# Altium PCB ArcNano_PCB.PcbDoc
Units mm, origin at the board's own origin, x right, y up, seen from the top; angles counter-clockwise.
Board outline 17.78 x 43.18 mm, 2 copper layers (Top Layer, Bottom Layer), stack 1.67 mm thick; 41 components, 45 nets, 192 pads, 75 vias.
Unrouted connection lines stored in the file: 3.
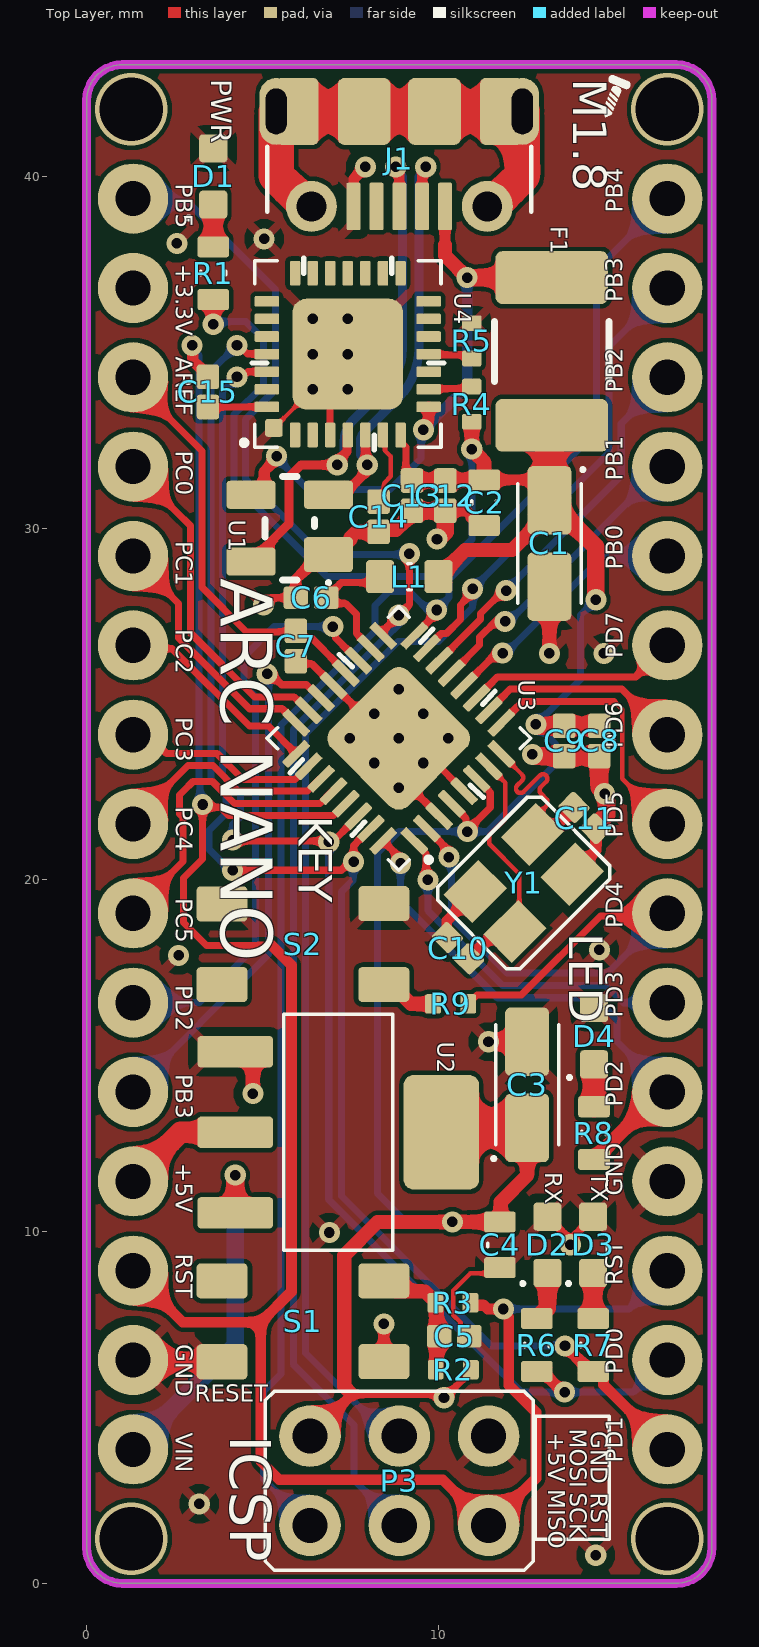
[diagram p0: Top Layer view]
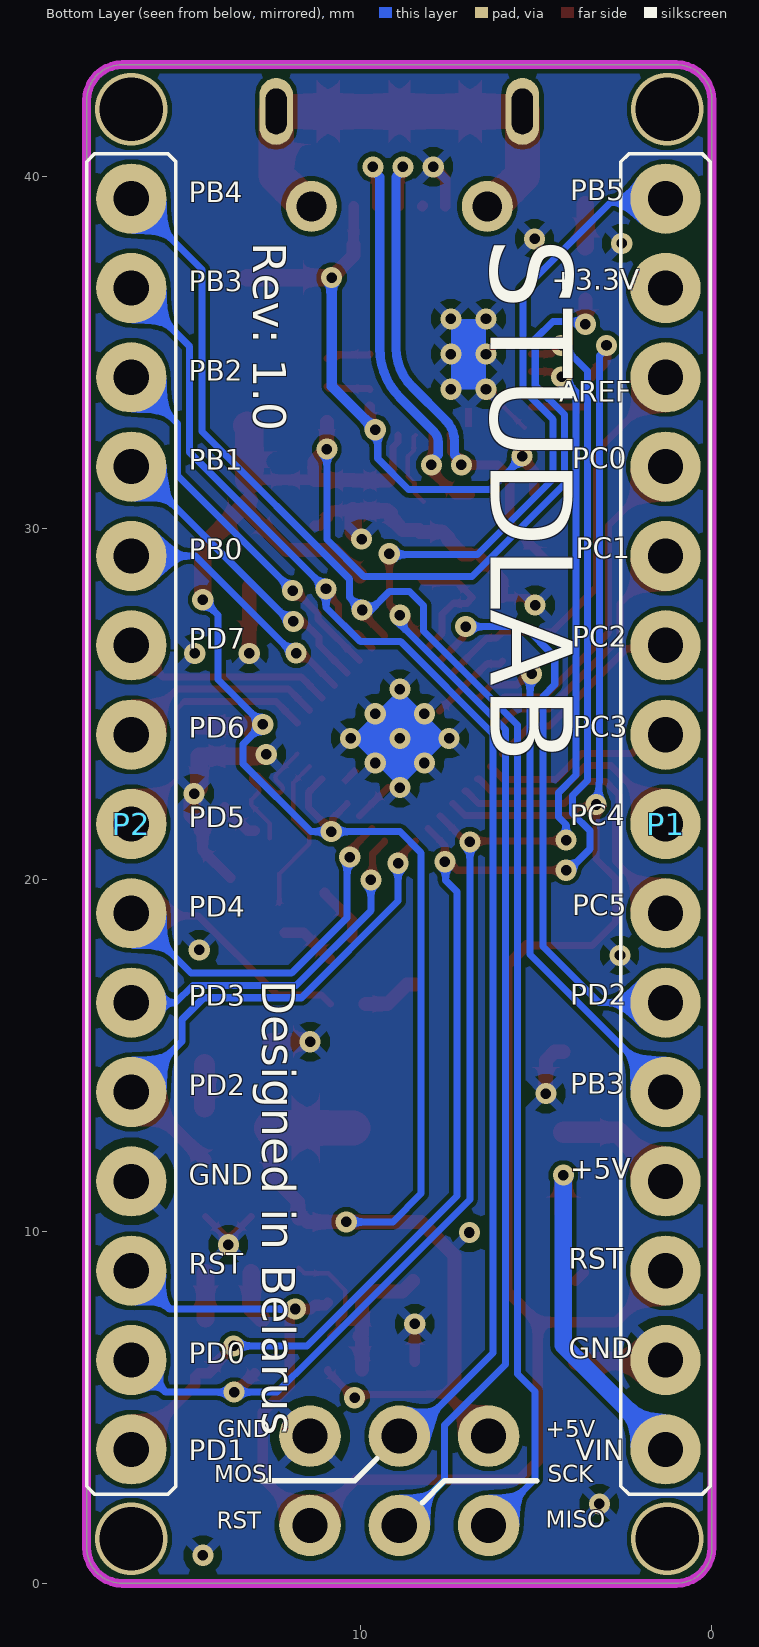
[diagram p1: Bottom Layer view, seen from below]
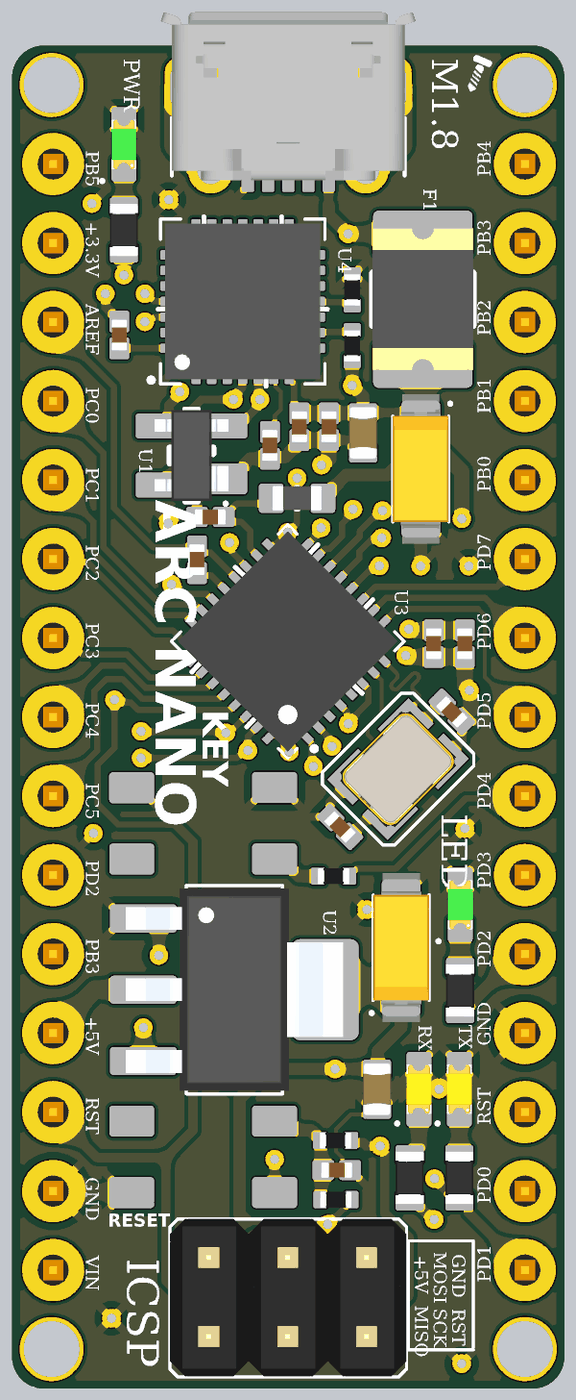
[diagram p2: 3D render of the assembled board from above, using the file's embedded part models]

## Layer stack, top to bottom
Top Solder: solder mask 0.0102, Solder Resist, Dk 3.5
Top Layer: signal copper 0.035
Core: dielectric 1.6, FR-4, Dk 4.6
Bottom Layer: signal copper 0.035
Bottom Solder: solder mask 0.0102, Solder Resist, Dk 3.5

## Board outline
0,1.016 0,42.164 cw(c1.016,42.164) 1.016,43.18 16.764,43.18 cw(c16.764,42.164) 17.78,42.164 17.78,1.016 cw(c16.764,1.016) 16.764,0 1.016,0 cw(c1.016,1.016)

## Design rules (kind name [scope] priority, off if disabled: settings)
BoardOutlineClearance [All] p1: gap=0.2 ignorepadtopadclearanceinfootprint=FALSE except(0: Arc-SplitContinuation Track-SplitContinuation SMDPad-SplitContinuation THPad-SplitContinuation Via-SplitContinuation Fill-SplitContinuation Poly-SplitContinuation Region-SplitContinuation Text-SplitContinuation)
Clearance Clearance_DifferentNets [All] p1: gap=0.127 ignorepadtopadclearanceinfootprint=TRUE except(0.15: Text-Text; 0.2: Arc-SMDPad Arc-THPad Track-SMDPad Track-THPad; 0.254: Arc-Via Track-Via Via-Via; 0.5: THPad-Via)
Clearance Clearance_SameNets [All] p2: gap=0.127 ignorepadtopadclearanceinfootprint=TRUE except(0: SMDPad-Fill SMDPad-Poly SMDPad-Region Region-Region; 0.15: Text-Text; 0.2: Arc-SMDPad Arc-THPad Track-SMDPad Track-THPad; 0.254: Arc-Via Track-Via Via-Via)
DiffPairsRouting [All] p1: maxlimit=0.254 minlimit=0.203 mostfreqgap=0.203 toplayer_minwidth=0.261 toplayer_maxwidth=0.381 toplayer_prefwidth=0.261 bottomlayer_minwidth=0.261 bottomlayer_maxwidth=0.381 bottomlayer_prefwidth=0.261 maxuncoupledlength=12.7
HoleSize [All] p1: absolutevalues=TRUE maxlimit=6.3 minlimit=0.2 maxpercent=80.000 minpercent=20.000
HoleToHoleClearance [All] p1: gap=0.5 allowstackedmicrovias=TRUE
MatchedLengths USB [InDifferentialPair('USB')] p1: tolerance=0.1 checknetsindiffpair=TRUE checkdiffpairvsdiffpair=FALSE checkxsignals=FALSE checkothers=FALSE
MinimumAnnularRing [All] p1: minimumring=0.13
MinimumSolderMaskSliver [All] p1: minsoldermaskwidth=0.05
PolygonConnect [All] p1: connectstyle=Relief reliefconductorwidth=0.254 reliefentries=4 polygonreliefangle="45 Angle" airgapwidth=0.254
RoutingVias [All] p1: holewidth=0.3 width=0.6 viastyle="Through Hole" minholewidth=0.2 minwidth=0.4 maxholewidth=6.3 maxwidth=6.35
ShortCircuit [All] p1: allowed=TRUE
SilkToSilkClearance [All] p1: silktosilkclearance=0.15
SolderMaskExpansion [All] p1: expansion=0.05 istentingtop=FALSE useseparateexpansions=TRUE expansionbottom=0.05 istentingbottom=FALSE
UnRoutedNet [All] p1: checkbadconnections=TRUE
Width [All] p1: maxlimit=1 minlimit=0.09 preferedwidth=0.2 minimp=50.000000 maximp=50.000000 favimp=50.000000
23 further rules are at their usual default settings.

## Classes and differential pairs
component class ArcNano_Schematic_POWER: C1 C2 C3 C4 D1 F1 J1 R1 U1 U2
component class ArcNano_Schematic_MCU: C5 C6 C7 C8 C9 C10 C11 C12 C13 C14 C15 D2 D3 D4 L1 P1 P2 P3 R2 R3 R4 R5 R6 R7 R8 R9 S1 S2 U3 U4 Y1
differential pair USB: +USB_P -USB_N

## Components (designator, comment, footprint, x,y, rotation, side; value= is the part's Value field where it differs from the comment)
C1 "" "TANT A" 13.157,29.566 r270 top value=10uF
C2 "" C0603 11.3,30.725 r90 top value=0.1uF
C3 "" "TANT A" 12.525,14.175 r90 top value=10uF
C4 "" C0603 11.75,9.625 r90 top value=0.1uF
C5 "" C0402 10.45,7.025 r180 top value=0.1uF
C6 "" C0402 6.38,28.025 r0 top value=0.1uF
C7 "" C0402 5.95,26.65 r90 top value=0.1uF
C8 "" C0402 14.575,23.95 r90 top value=0.1uF
C9 "" C0402 13.575,23.95 r90 top value=0.1uF
C10 "" C0402 10.56,18.059 r315 top value=10pF
C11 "" C0402 14.16,21.759 r135 top value=10pF
C12 "" C0402 10.2,30.925 r90 top value=1uF
C13 "" C0402 9.25,30.925 r90 top value=0.1uF
C14 "" C0402 8.3,30.325 r90 top value=0.1uF
C15 "" C0402 3.45,33.875 r270 top value=0.1uF
D1 "PWR" D0603_LED_RED 3.6,40 r90 top value=RED
D2 "RX" D0603_LED_YELLOW 13.1,9.625 r90 top value=YELLOW
D3 "TX" D0603_LED_YELLOW 14.4,9.625 r90 top value=YELLOW
D4 "LED" D0603_LED_GREEN 14.427,15.557 r90 top value=GREEN
F1 "" MF-MSMF050 13.225,35.025 r270 top value=0.5A
J1 "USB Type-B Micro" "USB MOLEX 1050170001" 8.89,41.5 r180 top
L1 "" IND0603 9.175,28.625 r180 top value=10uH
P1 "Header 15" "CONN-15 1x15 MALE" 1.32,21.59 r270 bottom value=1x15
P2 "Header 15" "CONN-15 1x15 MALE" 16.51,21.59 r90 bottom value=1x15
P3 "Connector 2x3 0.1\"" "CONN-6 2x3 MALE" 8.89,2.916 r90 top value=2x3
R1 "" R0603 3.6,37.25 r90 top value=1k
R2 "" R0402 10.425,6.075 r0 top value=10k
R3 "" R0402 10.414,7.976 r180 top value=1k
R4 "" R0402 10.95,33.525 r270 top value=4.7k
R5 "" R0402 10.95,35.325 r270 top value=10k
R6 "" R0603 12.8,6.775 r90 top value=1k
R7 "" R0603 14.4,6.775 r90 top value=1k
R8 "" R0603 14.425,12.8 r90 top value=1k
R9 "" R0402 10.35,16.475 r180 top value=1k
S1 "RESET" PTS815SJG250SMTRLFS 6.15,7.45 r180 top
S2 "KEY" PTS815SJG250SMTRLFS 6.15,18.175 r0 top
U1 "SP0503BAHTG" SOT143-4 5.775,30 r180 top
U2 "AMS1117-5.0" SOT-223 7.155,12.825 r0 top
U3 "ATmega328P" "QFN-32 (5x5)  Thermal Pad" 8.875,24.025 r135 top
U4 "" "QFN-28 (5x5) Thermal Pad" 7.425,34.95 r90 top
Y1 "16.000MHz" TSX-3225 12.41,19.934 r45 top

## Footprints (in the part's own frame and the unit in brackets; to place one, negate y for a bottom-side part, rotate by r counter-clockwise, add the part's x,y. Pads: shape width x height; smd on the part's side, far side on the other; paste and mask are expansions set on the pad)
C0402 [mm] "Chip Capacitor, 2-Leads, Body 1,00x0,50mm, IPC Medium Density"
  rrect25% 0.7x0.64 smd: 1(-0.43,0) 2(0.43,0)
  body extent -0.5,-0.25 0.5,0.25, height 0.55
C0603 [mm] "Chip Capacitor, 2-Leads, Body 1,60x0,80mm, IPC Medium Density"
  rrect25% 0.6x0.9 smd: 1(-0.65,0) 2(0.65,0)
  silkscreen extent -0.05,-0.35 0.05,0.35, body extent -0.85,-0.45 0.85,0.45, height 0.9
"CONN-6 2x3 MALE" [mm]
  round 1.75 hole 1: 1(-1.27,2.54) 2(1.27,2.54) 3(-1.27,0) 4(1.27,0) 5(-1.27,-2.54) 6(1.27,-2.54)
  silkscreen extent -2.54,-3.81 2.54,3.81, body extent -2.53,-3.81 2.55,3.81, height 9.2
"CONN-15 1x15 MALE" [mm]
  round 2 hole 1: 1(-17.78,0) 2(-15.24,0) 3(-12.7,0) 4(-10.16,0) 5(-7.62,0) 6(-5.08,0) 7(-2.54,0) 8(0,0) 9(2.54,0) 10(5.08,0) 11(7.62,0) 12(10.16,0) 13(12.7,0) 14(15.24,0) 15(17.78,0)
  silkscreen extent -19.05,-1.27 19.05,1.27, body extent -19.05,-1.27 19.05,1.27, height 8.89
D0603_LED_GREEN [mm] "Molded Diode, 2-Leads, Body 1,60x0,80mm, IPC Medium Density"
  rrect25% 0.8x0.8 smd: 1(-0.8,0) 2(0.8,0)
  silkscreen extent -1.22,0.65 -1.13,0.75, body extent -0.8,-0.4 0.8,0.4, height 0.4
D0603_LED_RED [mm] "Molded Diode, 2-Leads, Body 1,60x0,80mm, IPC Medium Density"
  rrect25% 0.8x0.8 smd: 1(-0.8,0) 2(0.8,0)
  silkscreen extent -1.22,0.65 -1.13,0.75, body extent -0.8,-0.4 0.8,0.4, height 0.4
D0603_LED_YELLOW [mm] "Molded Diode, 2-Leads, Body 1,60x0,80mm, IPC Medium Density"
  rrect25% 0.8x0.8 smd: 1(-0.8,0) 2(0.8,0)
  silkscreen extent -1.15,0.65 -1.05,0.75, body extent -0.8,-0.4 0.8,0.4, height 0.4
IND0603 [mm] "Chip Inductor, 2-Leads, Body 1,60x0,80mm, IPC Medium Density"
  rrect25% 0.8x0.94 smd: 1(-0.83,0) 2(0.83,0)
  silkscreen extent -0.05,-0.37 0.05,0.37, body extent -0.8,-0.4 0.8,0.4, height 0.95
MF-MSMF050 [mm] "Fuse 0.5A"
  rrect25% 1.5x3.2 smd: 1(-2.1,0) 2(2.1,0)
  silkscreen extent -0.85,-1.63 0.85,1.63, body extent -2.27,-1.62 2.28,1.62, height 0.85
PTS815SJG250SMTRLFS [mm] "3.2x4.2 Tact Switch"
  rrect25% 1.45x1 smd: 1(-2.302,1.144) 1(2.3,1.15) 2(-2.3,-1.15) 2(2.3,-1.15)
  body extent -2.25,-1.6 2.25,1.6, height 2.5
"QFN-28 (5x5) Thermal Pad" [mm] "QFN, 28-Leads, Body 5,00x5,00mm, Pitch 0,50mm, Thermal Pad 3,15x3,15mm, IPC Medium Density"
  rrect25% 0.7x0.3 smd: 1(-2.3,1.5) 2(-2.3,1) 3(-2.3,0.5) 4(-2.3,0) 5(-2.3,-0.5) 6(-2.3,-1) 7(-2.3,-1.5) "15 : NC"(2.3,-1.5) "16 : NC"(2.3,-1) "17 : NC"(2.3,-0.5) "18 : NC"(2.3,0) "19 : NC"(2.3,0.5) "20 : NC"(2.3,1) "21 : NC"(2.3,1.5)
  rrect25% 0.5x0.5 smd: 3(-2.1,2.1)
  rrect25% 3.15x3.15 smd: 3(0,0)
  rrect25% 0.3x0.7 smd: 8(-1.5,-2.3) 9(-1,-2.3) "10 : NC"(-0.5,-2.3) 11(0,-2.3) 12(0.5,-2.3) "13 : NC"(1,-2.3) "14 : NC"(1.5,-2.3) "22 : NC"(1.5,2.3) 23(1,2.3) 24(0.5,2.3) 25(0,2.3) 26(-0.5,2.3) 27(-1,2.3) 28(-1.5,2.3)
  Top Layer region: -2.075,0.4 -1.525,0.4 -1.525,0.6 -2.075,0.6
  silkscreen extent -2.65,-2.65 2.65,2.97, body extent -2.5,-2.5 2.5,2.5, height 1
"QFN-32 (5x5)  Thermal Pad" [mm] "QFN, 32-Leads, Body 5,00x5,00mm, Pitch 0,50mm, Thermal Pad 3,10x3,10mm, IPC Medium Density"
  rrect25% 0.9x0.25 smd: 1(-2.375,1.75) 2(-2.375,1.25) 3(-2.375,0.75) 4(-2.375,0.25) 5(-2.375,-0.25) 6(-2.375,-0.75) 7(-2.375,-1.25) 8(-2.375,-1.75) 17(2.375,-1.75) 18(2.375,-1.25) 19(2.375,-0.75) 20(2.375,-0.25) 21(2.375,0.25) 22(2.375,0.75) 23(2.375,1.25) 24(2.375,1.75)
  rrect25% 3.1x3.1 smd: 5(0,0)
  rrect25% 0.25x0.9 smd: 9(-1.75,-2.375) 10(-1.25,-2.375) 11(-0.75,-2.375) 12(-0.25,-2.375) 13(0.25,-2.375) 14(0.75,-2.375) 15(1.25,-2.375) 16(1.75,-2.375) 25(1.75,2.375) 26(1.25,2.375) 27(0.75,2.375) 28(0.25,2.375) 29(-0.25,2.375) 30(-0.75,2.375) 31(-1.25,2.375) 32(-1.75,2.375)
  Top Layer region: -2.025,-0.35 -1.475,-0.35 -1.475,-0.15 -2.025,-0.15
  silkscreen extent -3.07,-2.65 2.65,2.65, body extent -2.5,-2.5 2.5,2.5, height 0.9
R0402 [mm] "Chip Resistor, 2-Leads, Body 1,00x0,50mm, IPC Medium Density"
  rrect25% 0.45x0.55 smd: 1(-0.5,0) 2(0.5,0)
  body extent -0.51,-0.25 0.51,0.25, height 0.36
R0603 [mm] "Chip Resistor, 2-Leads, Body 1,60x0,85mm, IPC Medium Density"
  rrect25% 0.6x0.9 smd: 1(-0.75,0) 2(0.75,0)
  silkscreen extent -0.05,-0.35 0.05,0.35, body extent -0.85,-0.45 0.85,0.45, height 0.55
SOT143-4 [mm] "SOT143, 4-Leads, Body 2,92x2,51mm, Pitch 1,90mm, IPC Medium Density"
  rrect25% 1.4x1 smd: 1(-1.1,0.75)
  rrect25% 1.4x0.8 smd: 2(-1.1,-0.95) 3(1.1,-0.95) 4(1.1,0.95)
  silkscreen extent -1.15,-1.48 0.7,1.6, body extent -1.18,-1.46 1.19,1.46, height 1.22
SOT-223 [mm] "SOT223, 4-Leads, Body 6,51x7,00mm (avg), Pitch 2,29mm, IPC Medium Density"
  rrect25% 2.15x0.9 smd: 1(-2.93,2.29) 2(-2.93,0) 3(-2.93,-2.29)
  rrect25% 2.15x3.25 smd: 2(2.93,0)
  silkscreen extent -1.55,-3.35 1.55,3.35, body extent -3.5,-3.25 3.5,3.25, height 1.8
"TANT A" [mm] "Molded Capacitor, 2-Leads, Body 3,20x1,60mm, IPC Medium Density"
  rrect25% 1.95x1.25 smd: 1(-1.225,0) 2(1.225,0)
  silkscreen extent -2.15,-0.9 1.7,1, body extent -2.4,-0.9 2.4,0.9, height 1.8
TSX-3225 [mm] "Crystal"
  rect 1.4x1.15 smd: 1(-1.15,-0.825) 2(1.15,-0.825) 3(1.15,0.775) 4(-1.15,0.775)
  silkscreen extent -2.07,-1.68 2.08,1.63, body extent -1.6,-1.28 1.6,1.23, height 0.6
"USB MOLEX 1050170001" [mm]
  rrect25% 0.4x1.35 smd: 1(-1.3,2.35) 2(-0.65,2.35) 3(0,2.35) 4(0.65,2.35) 5(1.3,2.35)
  round 1.45 hole 0.85: SH1(-2.5,2.35) SH2(2.5,2.35)
  oval 0.95x1.9 hole 0.6 slot 1.3 at 90 deg: SH3(-3.5,-0.35) SH8(3.5,-0.35)
  rrect25% 1.2x1.9 smd: SH4(-2.9,-0.35) SH7(2.9,-0.35)
  rrect25% 1.5x1.9 smd: SH5(-1,-0.35) SH6(1,-0.35)
  silkscreen extent -3.75,0.65 3.75,2.5, body extent -4.1,-2.75 4.1,2.65, height 2.66

## Part data
C1 C3: library part Capacitor_POL, Case="TANT A", JLCPCB Part #=C7171, Manufacturer=AVX, MFR.Part #=TAJA106K016RNJ, HelpURL=https://lcsc.com/product-detail/Tantalum-Capacitors_AVX-TAJA106K016RNJ_C7171.html, Model=TAJA106K016RNJ
C2 C4: library part Capacitor, Case=C0603, JLCPCB Part #=C77055, Manufacturer="Murata Electronics", MFR.Part #=GRM188R71H104KA93D, HelpURL=https://lcsc.com/product-detail/Multilayer-Ceramic-Capacitors-MLCC-SMD-SMT_Murata-Electronics-GRM188R71H104KA93D_C77055.html, Model=GRM188R71H104KA93D
C5 C6 C7 C8 C9 C13 C14 C15: library part Capacitor, Case=C0402, JLCPCB Part #=C77020, Manufacturer="Murata Electronics", MFR.Part #=GRM155R71H104KE14D, HelpURL=https://lcsc.com/product-detail/Multilayer-Ceramic-Capacitors-MLCC-SMD-SMT_Murata-Electronics-GRM155R71H104KE14D_C77020.html, Model=GRM155R71H104KE14D
C10 C11: library part Capacitor, Case=C0402, JLCPCB Part #=C32949, Manufacturer="Samsung Electro-Mechanics", MFR.Part #=CL05C100JB5NNNC, HelpURL=https://lcsc.com/product-detail/Multilayer-Ceramic-Capacitors-MLCC-SMD-SMT_Samsung-Electro-Mechanics-CL05C100JB5NNNC_C32949.html, Model=CL05C100JB5NNNC
C12: library part Capacitor, Case=C0402, JLCPCB Part #=C126521, Manufacturer="Murata Electronics", MFR.Part #=GCM155C71A105KE38D, HelpURL=https://lcsc.com/product-detail/Multilayer-Ceramic-Capacitors-MLCC-SMD-SMT_Murata-Electronics-GCM155C71A105KE38D_C126521.html, Model=GCM155C71A105KE38D
D1: library part LED, Case=0603, JLCPCB Part #=C72044, Manufacturer="Everlight Elec", MFR.Part #=19-217/R6C-AL1M2VY/3T, HelpURL=https://lcsc.com/product-detail/Light-Emitting-Diodes-LED_Everlight-Elec-19-217-R6C-AL1M2VY-3T_C72044.html, Model=19-217/R6C-AL1M2VY/3T
D2 D3: library part LED, "LED Indication - Discrete 1.95V", Case=0603, JLCPCB Part #=C72038, Manufacturer="Everlight Elec", MFR.Part #=19-213/Y2C-CQ2R2L/3T(CY), HelpURL=https://lcsc.com/product-detail/Light-Emitting-Diodes-LED_Everlight-Elec-19-213-Y2C-CQ2R2L-3T-CY_C72038.html, Model=19-213/Y2C-CQ2R2L/3T(CY)
D4: Case=0603, JLCPCB Part #=C72043, Manufacturer="Everlight Elec", MFR.Part #=19-217/GHC-YR1S2/3T, HelpURL=https://lcsc.com/product-detail/Light-Emitting-Diodes-LED_Everlight-Elec-19-217-GHC-YR1S2-3T_C72043.html, Model=19-217/GHC-YR1S2/3T
F1: library part Fuse, Case=1812, JLCPCB Part #=C17313, Manufacturer=Bourns, MFR.Part #=MF-MSMF050-2, HelpURL=https://lcsc.com/product-detail/Resettable-Fuses_BOURNS-MF-MSMF050-2_C17313.html, Model=MF-MSMF050
J1: "USB - micro B USB 2.0 Receptacle Connector 5 Position Surface Mount, Right Angle; Through Hole", JLCPCB Part #=C136000, Manufacturer=Molex, MFR.Part #=1050170001, Case="USB Type-B Micro", HelpURL=https://lcsc.com/product-detail/USB-Connectors_MOLEX-1050170001_C136000.html, Model="USB Type-B Micro"
L1: library part Inductor, Case=IND0603, JLCPCB Part #=C1035, Manufacturer=Sunlord, MFR.Part #=SDFL1608S100KTF, HelpURL=https://lcsc.com/product-detail/Inductors-SMD_Sunlord-SDFL1608S100KTF_C1035.html, Model=SDFL1608S100KTF
P1 P2: library part "Connector 1x15 0.1\"", Case=1x15, JLCPCB Part #=C124373, Manufacturer="Ckmtw(Shenzhen Cankemeng)", MFR.Part #=B-2100S15P-A110, HelpURL=https://lcsc.com/product-detail/Pin-Headers_Ckmtw-Shenzhen-Cankemeng-B-2100S15P-A110_C124373.html
P3: Case=2x3, JLCPCB Part #=C412086, Manufacturer="Amphenol ICC", MFR.Part #=67996-106HLF, HelpURL=https://lcsc.com/product-detail/Pin-Headers_Amphenol-ICC-67996-106HLF_C412086.html
R1 R6 R7 R8: library part Resistor, Case=R0603, JLCPCB Part #=C14676, Manufacturer=YAGEO, MFR.Part #=RC0603JR-071KL, HelpURL=https://lcsc.com/product-detail/Chip-Resistor-Surface-Mount_YAGEO-RC0603JR-071KL_C14676.html, Model=RC0603JR-071KL
R2 R5: library part Resistor, Case=R0402, JLCPCB Part #=C60489, Manufacturer=YAGEO, MFR.Part #=RC0402JR-0710KL, HelpURL=https://lcsc.com/product-detail/Chip-Resistor-Surface-Mount_YAGEO-RC0402JR-0710KL_C60489.html, Model=RC0402JR-0710KL
R3 R9: library part Resistor, Case=R0402, JLCPCB Part #=C105637, Manufacturer=YAGEO, MFR.Part #=RC0402JR-071KL, HelpURL=https://lcsc.com/product-detail/Chip-Resistor-Surface-Mount_YAGEO-RC0402JR-071KL_C105637.html, Model=RC0402JR-071KL
R4: library part Resistor, Case=R0402, JLCPCB Part #=C105870, Manufacturer=YAGEO, MFR.Part #=RC0402JR-074K7L, HelpURL=https://lcsc.com/product-detail/Chip-Resistor-Surface-Mount_YAGEO-RC0402JR-074K7L_C105870.html, Model=RC0402JR-074K7L
S1 S2: library part Button, Case=3.2x2.5mm, JLCPCB Part #=C411883, Manufacturer=C&K, MFR.Part #=PTS815SJG250SMTRLFS, HelpURL=https://lcsc.com/product-detail/Tactile-Switches_C-K-PTS815SJG250SMTRLFS_C411883.html, Model=PTS815SJG250
U1: "TVS DIODE 5.5V 8.5V", Case=SOT-143, JLCPCB Part #=C7074, Manufacturer="Littelfuse Inc.", HelpURL=https://lcsc.com/product-detail/TVS_Littelfuse-SP0503BAHTG_C7074.html, MFR.Part #=SP0503BAHTG, Model=SP0503BAHTG
U2: Case=SOT-223, JLCPCB Part #=C6187, Manufacturer="Advanced Monolithic Systems", HelpURL=https://lcsc.com/product-detail/Linear-Voltage-Regulators-LDO_Advanced-Monolithic-Systems-AMS1117-5-0_C6187.html, MFR.Part #=AMS1117-5.0, Model=AMS1117-5.0
U3: "AVR series Microcontroller IC 8-Bit", Case="QFN-32 (5x5)", JLCPCB Part #=C38896, Manufacturer="Microchip Technology", MFR.Part #=ATMEGA328P-MU, HelpURL=https://lcsc.com/product-detail/ATMEL-AVR_Microchip-Tech-ATMEGA328P-MU_C38896.html, Model=ATMEGA328P-MU
U4: library part CP2102, "USB Bridge, USB to UART USB 2.0 UART Interface", Case="QFN-28 (5x5)", JLCPCB Part #=C6568, Manufacturer="Silicon Laboratories", MFR.Part #=CP2102-GMR, HelpURL=https://lcsc.com/product-detail/USB-ICs_SILICON-LABS-CP2102-GMR_C6568.html, Model=CP2102-GMR
Y1: library part Crystal_TSX-3225, "CRYSTAL 24.0000MHZ 9PF SMD", Case=TSX-3225, JLCPCB Part #=C13738, Manufacturer="Yangxing Tech", MFR.Part #=X322516MLB4SI, HelpURL=https://lcsc.com/product-detail/Crystals_Yangxing-Tech-X322516MLB4SI_C13738.html, Model=X322516MLB4SI

## Via types
v1: diameter 0.6, hole 0.3, Top Layer to Bottom Layer, 71 vias
v2: diameter 2.06, hole 1.8, Top Layer to Bottom Layer, 4 vias

## Nets (pads, with @x,y where several pads share a name; then routed paths per layer and width w, separated by ;. In a path a pad name is that pad's centre, name@x,y a point inside that pad or via, vN(x,y) a via of type N, cw(c..) or ccw(c..) an arc to the next point about the centre after c; other vN are vias at no path point)
+3.3V: P1.2
+5V: C1.1 C2.2 C3.1 C4.2 C8.2 C9.2 C12.2 C13.2 F1.2 L1.1 P1.12 P3.2 R1.1 R2.2 R4.2 U2.2 U3.4 U3.6 U4.7 | length 85.8
  Top Layer w0.2: 7.55,5.375 10.063,5.375 v1(10.16,5.278) 10.178,5.278 10.925,6.025 R2.2 ; U4.7 8.925,32.454 9.075,32.304 9.075,31.53 C13.2 ; U3.4 10.378,22.155 10.782,21.751 v1@10.782,21.325 ; v1(10.825,21.375) 10.825,21.411 11.475,22.061 11.475,22.486 U3.6
  Top Layer w0.3: P3.2 6.361,4.186 7.55,5.375 ; C2.2 C1.1@13.151,31.375
  Top Layer w0.4: v1(3.6,35.8) R1.1 ; 7.55,5.375 7.325,5.6 7.325,9.325 8.275,10.275 v1(10.4,10.275) 11.5,10.275 11.6,10.375 11.75,10.375 11.773,10.398 11.773,10.848 12.525,11.6 C3.1 ; C13.2@9.2,31.355 C12.2 10.21,31.365 C2.2@11.29,31.365 ; L1.1 10.005,28.695 10.205,28.895 10.275,28.895 10.755,29.375 12.092,29.375 13.157,30.441 C1.1 ; R4.2 v1(10.95,32.25) 11.3,31.9 C2.2
  Top Layer w0.5: v1(12.772,24.421) 12.799,24.421 12.84,24.38 C9.2 C8.2 ; C1.1 14.478,29.47 v1(14.478,27.965)
  Top Layer w0.6: P1.12@1.27,11.43 2.665,12.825 U2.2@4.225,12.825
  Top Layer w0.8: C1.1@13.157,31.369 13.157,32.857 F1.2
  Top Layer w1: U2.2@10.21,12.95 C3.1
  Bottom Layer w0.2: v1(3.6,35.8) 3.675,35.875 4.525,35.875 5.025,35.375 5.025,34.062 4.194,33.232 4.194,31.259 6.827,28.626 8.899,28.626 8.904,28.621 9.446,28.621 9.451,28.626 9.901,28.626 10.95,29.675 v1(10.95,32.25) ; v1(10.4,10.275) 9.075,10.275 8.271,11.079 8.271,20.771 8.875,21.375 11.403,21.375 13.329,23.3 13.329,23.864 v1(12.772,24.421) 14.046,25.695 14.046,27.534 v1(14.478,27.965)
ADC6: P1.10 U3.19 | length 16.8
  Top Layer w0.2: v1(7,27.2) 7.077,27.123 7.077,26.884 U3.19
  Bottom Layer w0.2: P1.10@1.27,16.51 3.21,16.51 4.804,18.104 4.804,25.219 4.47,25.552 4.47,26.345 5.325,27.2 v1@7.077,27.2
ADC7: P1.11 U3.22 | length 15.3
  Top Layer w0.2: v1(5.131,25.857) 5.239,25.857 5.547,25.549 6.255,25.549 6.63,25.174 U3.22
  Bottom Layer w0.2: P1.11@1.27,13.97 5.175,17.875 5.175,25.813 v1(5.131,25.857)
AREF: C7.2 P1.3 U3.20 | length 11.9
  Top Layer w0.2: P1.3@1.27,34.29 1.27,34.205 3.277,32.198 3.277,28.321 4.548,27.05 5.92,27.05 C7.2 ; C7.2@5.95,27.05 6.126,26.874 6.401,26.874 7.133,26.142 7.133,26.121 U3.20
GND: C1.2 C2.1 C3.2 C4.1 C5.1 C6.1 C7.1 C8.1 C9.1 C10.1 C11.1 C12.1 C13.1 C14.1 D1.2 D2.2 D3.2 D4.2 J1.5 P1.14 P2.4 P3.6 R5.1 S1.1 S2.1 U1.1 U2.1 U3.3 U3.5 U3.21 U4.3 Y1.2 Y1.4 | length 38.8
  Top Layer w0.127: U4.3@5.325,32.85 v1(7.425,34.95) ; C5.1 10.633,7.271 10.633,7.416 10.425,7.624 10.425,8.327 10.912,8.814 11.589,8.814 C4.1
  Top Layer w0.2: v1(5.029,27.813) 5.241,28.025 C6.1 ; C7.1 6.025,26.145 6.401,26.145 U3.21 7.022,25.528 U3.5@7.75,24.8 ; v1(8.875,22.625) 9.214,22.625 U3.3 ; v1(8.875,24.025) v1(9.575,24.725) ; D2.2 13.665,9.86 13.665,9.703 13.741,9.627 13.818,9.703 13.818,9.843 D3.2
  Top Layer w0.3: C6.1 5.95,28.55 U1.1@6.675,29.275 ; J1.5 7.59,39.94 v1(7.925,40.275) v1@7.982,40.218 ; S1.1@8.452,6.306 v1@8.452,7.375 ; C12.1 10.797,30.495 10.922,30.37 10.922,30.303 11.15,30.075 C2.1 ; C10.1 10.235,18.384 10.235,18.834 11.013,19.612 Y1.4@11.013,19.633 ; Y1.2@13.7,20.058 14.485,20.843 C11.1@14.485,21.434 ; C8.1@14.575,23.595 C8.1@14.65,23.52
  Top Layer w0.4: U2.1 4.475,15.115 4.725,14.865 v1(4.725,13.925) ; U1.1 7.075,29.25 7.499,29.674 7.499,29.741 7.653,29.895 C14.1 ; C14.1@8.326,29.951 8.793,29.951 9.13,30.288 9.13,30.425 C13.1@9.2,30.495 ; v1(13.157,26.441) C1.2
  Top Layer w0.45: C13.1 C12.1@10.153,30.495
  Top Layer w0.5: P1.14@1.27,6.35 1.295,6.325 3.825,6.325 S1.1@3.85,6.3 ; v1(9.961,29.691) 9.982,29.711 10.006,29.711 10.2,29.905 C12.1 ; v1(11.425,15.4) C3.2 ; v1(12.675,23.571) 12.702,23.571 12.753,23.52 C8.1 14.575,22.627 14.725,22.477 v1(14.725,22.45) 14.744,22.431 14.744,22.264 14.78,22.228 14.78,21.855 14.471,21.547 14.485,21.533 C11.1@14.485,21.434
  other v1: 14.475,0.8 3.2,2.261 8.452,7.375 13.75,9.627 6.9,9.975 2.616,17.856 14.58,18.009 8.175,23.325 9.575,23.325 7.475,24.025 10.275,24.025 8.175,24.725 8.875,25.425 14.707,26.441 6.425,33.95 7.425,33.95 6.425,34.95 6.425,35.95 7.425,35.95 2.565,38.1 5.045,38.225
NetC5_2: C5.2 R2.1 R3.2 S1.2 | length 4
  Top Layer w0.3: S1.2@3.645,8.83 S1.2@3.875,8.6
  Top Layer w0.4: S1.2@8.5,8.6 8.8,8.3 9.625,8.3 9.875,8.05 9.925,8.05 9.95,8.025 9.95,7.975 9.95,7.095 C5.2 9.95,6.955 R2.1@9.95,6.075
NetC6_2: C6.2 L1.2 U3.18 | length 4
  Top Layer w0.2: U3.18 8.08,26.602 7.675,27.006 7.675,27.555 7.366,27.864 6.971,27.864 C6.2 7.235,28.45 8.17,28.45 L1.2
NetC14_2: C14.2 U4.6 | length 2.2
  Top Layer w0.127: C14.2@8.2,30.755 8.457,31.012 8.457,31.282 8.65,31.475 8.65,32.041 8.48,32.211 8.48,32.595 U4.6
NetC15_2: C15.2 U4.28 | length 1.6
  Top Layer w0.2: C15.2@3.575,33.445 3.58,33.45 U4.28
NetD1_1: D1.1 R1.2 | length 1.2
  Top Layer w0.5: R1.2 D1.1
NetD2_1: D2.1 R6.2 | length 1.4
  Top Layer w0.5: R6.2 13.1,7.825 D2.1
NetD3_1: D3.1 R7.2 | length 1.3
  Top Layer w0.5: R7.2 D3.1
NetD4_1: D4.1 R8.2 | length 1.2
  Top Layer w0.6: R8.2 D4.1@14.425,14.757
NetJ1_SH1: J1.SH1 J1.SH2 J1.SH3 J1.SH4 J1.SH5 J1.SH6 J1.SH7 J1.SH8 | length 13.2
  Top Layer w1: J1.SH8@5.39,41.725 5.39,40.025 J1.SH2@6.39,39.025 ; J1.SH8 J1.SH7 J1.SH6 J1.SH5 J1.SH4 J1.SH3 ; J1.SH1@11.39,39.025 12.39,40.025 J1.SH3@12.39,41.725
NetR4_1: R4.1 U4.9 | length 1.3
  Top Layer w0.2: U4.9 9.744,33.969 10.894,33.969 R4.1
NetR5_2: R5.2 U4.11 | length 1.3
  Top Layer w0.2: U4.11 9.744,34.931 10.844,34.931 R5.2
NetR9_2: R9.2 S2.2 | length 1.6
  Top Layer w0.4: S2.2@8.45,17.025 8.675,17.025 9.225,16.475 R9.2
PB0: P2.11 U3.12 | length 7.3
  Top Layer w0.2: U3.12 11.577,26.373 11.748,26.373 v1(11.825,26.45) ; P2.11@16.488,29.21 P2.11
  Bottom Layer w0.2: v1(11.825,26.45) 11.925,26.45 14.685,29.21 P2.11
"PB1 (OC1A)": P2.12 U3.13 | length 8.7
  Top Layer w0.2: U3.13 11.175,26.679 11.175,26.9 11.625,27.35 v1(11.9,27.35)
  Bottom Layer w0.2: v1(11.9,27.35) 12.005,27.35 16.405,31.75 P2.12
"PB2 (SPI_SS/OC1B)": P2.13 U3.14 | length 10.8
  Top Layer w0.2: U3.14 11.2,27.411 11.2,27.575 11.85,28.225 v1(11.925,28.225)
  Bottom Layer w0.2: v1(11.925,28.225) 15.2,31.5 15.2,32.98 P2.13
"PB3 (SPI_MOSI/OC2A)": P2.14 P3.4 U3.15 | length 41.2
  Top Layer w0.2: U3.15 10.082,27 10.225,27 10.625,27.4 10.625,27.817 10.975,28.167 v1(10.975,28.275)
  Bottom Layer w0.2: P3.4 8.589,4.186 7.075,5.7 6.225,6.55 6.225,24.15 8.85,26.775 10,26.775 10.975,27.75 v1(10.975,28.275) 14.85,32.15 14.85,35.17 P2.14
"PB4 (SPI_MISO)": P2.15 P3.1 U3.16 | length 45.6
  Top Layer w0.2: U3.16 9.317,26.955 9.95,27.588 v1(9.95,27.675)
  Bottom Layer w0.2: P3.1 5.029,2.967 5.029,5.454 5.525,5.95 5.525,24.4 8.2,27.075 8.2,27.8 8.6,28.2 9.175,28.2 9.7,27.675 v1(9.95,27.675) 10.3,28.025 10.3,28.55 14.5,32.75 14.5,37.36 P2.15
"PB5 (SPI_SCK)": P1.1 P3.3 U3.17 | length 47.5
  Top Layer w0.2: U3.17 8.379,26.996 8.379,27.029 9.175,27.825 v1(9.175,29.275)
  Bottom Layer w0.2: P1.1@1.27,39.37 1.366,39.274 2.876,39.274 5.375,36.775 5.375,33.95 4.521,33.096 4.521,31.394 6.666,29.25 9.15,29.25 v1(9.175,29.275) ; v1(8.875,27.525) 8.875,27.275 5.875,24.275 5.875,6.225 7.6,4.5 7.6,2.936 P3.3
"PC0 (ADC0)": P1.4 U3.23 | length 9.7
  Top Layer w0.2: P1.4@1.27,31.75 2.554,30.466 2.946,30.074 2.946,27.029 4.772,25.203 5.894,25.203 6.276,24.82 U3.23
"PC1 (ADC1)": P1.5 U3.24 | length 7.2
  Top Layer w0.2: P1.5@1.27,29.21 2.616,27.864 2.616,26.884 4.633,24.867 5.559,24.867 U3.24
"PC2 (ADC2)": P1.6 U3.25 | length 6
  Top Layer w0.2: P1.6@1.27,26.67 1.366,26.574 2.426,26.574 4.625,24.375 5.166,24.375 U3.25
"PC3 (ADC3)": P1.7 U3.26 | length 5.7
  Top Layer w0.2: P1.7@1.27,24.13 1.736,24.13 2.266,23.6 3.701,23.6 4.441,22.86 5.922,22.86 6.292,23.23 U3.26@6.298,23.23
"PC4 (ADC4/I2C_SDA)": P1.8 U3.27 | length 6.6
  Top Layer w0.2: P1.8@1.27,21.59 1.27,21.642 2.878,23.25 3.588,23.25 4.308,22.53 6.284,22.53 6.63,22.876 U3.27
"PC5 (ADC5/I2C_SCL)": P1.9 U3.28 | length 9
  Top Layer w0.2: P1.9@1.27,19.05 2.743,20.523 2.743,21.772 2.641,21.874 2.641,22.416 2.743,22.518 3.029,22.804 3.571,22.804 4.199,22.177 6.638,22.177 6.983,22.522 U3.28
"PC6 (RESET)": C15.1 P1.13 P2.3 P3.5 R3.1 U3.29 | length 64.8
  Top Layer w0.2: v1(3.295,22.145) 3.295,20.595 2.75,20.05 2.75,18.789 3.404,18.136 5.264,18.136 ; v1@3.327,22.123 3.39,22.061 3.802,22.061 4.034,21.829 7.019,21.829 7.359,22.169 U3.29
  Top Layer w0.3: P1.13@1.27,8.89 2.735,7.425 4.953,7.425 ; v1@3,35.125 3.016,35.109 3.016,34.769 3.45,34.335 C15.1 ; 5.264,18.136 5.825,17.575 5.825,8.297 4.953,7.425 ; R3.1@10.925,7.975 10.992,7.908 11.302,7.908 11.41,7.8 v1(11.85,7.8) 11.85,7.719 12,7.569 12,7.525 12,5.639 12.776,4.863 12.776,2.992 P3.5 10.126,2.95 5.476,2.95 4.953,3.473 4.953,7.425
  Bottom Layer w0.2: v1@3,35.125 3,35.104 3.2,34.904 3.2,22.772 3.219,22.753 3.219,22.222 v1(3.295,22.145) ; v1(11.85,7.8) 15.42,7.8 P2.3
  other v1: 3,35.2
"PD0 (USART_RX)": P2.2 R6.1 U3.30 U4.26 | length 41.7
  Top Layer w0.2: v1@4.14,21.133 v1@4.166,21.107 ; v1(4.15,21.133) 4.175,21.107 6.858,21.107 v1(6.883,21.082) 6.992,21.082 7.161,21.252 ; v1@4.325,34.3 4.433,34.3 4.583,34.45 U4.26 ; 7.162,21.252 U3.30
  Top Layer w0.3: R6.1@13,5.975 13.1,5.875 13.539,5.436 v1(13.589,5.436)
  Bottom Layer w0.2: v1(4.15,21.133) 4.15,21.574 4.369,21.793 4.369,22.479 3.867,22.981 3.867,33.892 v1(4.275,34.3) ; v1(6.883,21.082) 6.883,10.916 9.54,8.26 11.377,6.423 12.364,5.436 v1(13.589,5.436) 15.536,5.436 16.45,6.35 P2.2
"PD1 (USART_TX)": P2.1 R7.1 U3.31 U4.25 | length 43.6
  Top Layer w0.2: v1(4.15,20.275) 7.243,20.275 7.484,20.517 v1(7.593,20.517) 7.593,20.975 U3.31 ; v1(4.275,35.2) 4.326,35.2 4.571,34.956 5.119,34.956 U4.25
  Top Layer w0.3: v1(13.6,6.75) 14.1,6.25 14.1,6.175 14.3,5.975 14.596,5.975 14.696,5.875 14.696,5.65 P2.1@16.51,3.836
  Bottom Layer w0.2: v1(4.15,20.275) 4.073,20.275 3.475,20.873 3.475,21.4 3.962,21.887 3.962,22.403 3.54,22.825 3.54,34.465 v1(4.275,35.2) ; v1(7.593,20.517) 7.575,20.499 7.575,19.99 7.25,19.664 7.25,11.012 11.512,6.75 v1(13.6,6.75)
PD2: P2.5 R8.1 U3.32 | length 15
  Top Layer w0.2: U3.32 8.848,20.693 8.848,20.552 v1(8.925,20.475)
  Top Layer w0.4: R8.1 16.345,13.97 P2.5
  Bottom Layer w0.2: v1(8.925,20.475) 8.925,19.4 11.675,16.65 14.45,16.65 15.075,16.025 15.075,15.405 P2.5
"PD3 (OC2B)": P2.6 U3.1 | length 10
  Top Layer w0.2: U3.1 9.317,21.073 9.646,20.744 9.646,20.054 v1(9.7,20)
  Bottom Layer w0.2: v1(9.7,20) 9.7,19.125 11.825,17 14.76,17 15.25,16.51 P2.6
PD4: P2.7 R9.1 U3.2 | length 17
  Top Layer w0.2: U3.2 10.223,20.909 10.223,20.727 v1(10.3,20.65) ; R9.1 11.1,16.725 12.356,16.725 14.606,18.975 16.435,18.975 P2.7
  Bottom Layer w0.2: v1(10.3,20.65) 10.377,20.573 10.377,18.923 11.95,17.35 14.81,17.35 P2.7
"PD5 (OC0B)": P2.8 U3.9 | length 8
  Top Layer w0.127: 15,25.075 15.225,24.85 15.225,22.875 P2.8
  Top Layer w0.2: U3.9 12.4,25.075 15,25.075 ; P2.8 P2.8@16.51,21.99
"PD6 (OC0A)": P2.9 U3.10 | length 5.9
  Top Layer w0.2: U3.10 12.043,25.425 15.215,25.425 P2.9
PD7: P2.10 U3.11 | length 6
  Top Layer w0.2: U3.11 11.686,25.775 15.615,25.775 P2.10
USB_N: J1.2 U1.2 U4.5 | length 12.6
  Top Layer w0.261: v1@7.914,31.564 7.914,31.735 v1(7.979,31.8) 7.932,31.847 7.932,32.643 U4.5 ; J1.2 9.541,39.151 v1@9.541,40.083
  Top Layer w0.264: U1.2 7.3,30.95 v1@7.914,31.564
  Bottom Layer w0.261: v1(7.979,31.8) 7.979,31.892 7.784,32.087 7.784,32.456 cw(c8.192,32.456) 7.904,32.745 8.862,33.704 ccw(c7.451,35.115) 9.447,35.115 9.447,39.988 9.642,40.183 v1(9.642,40.275)
USB_P: J1.3 U1.4 U4.4 | length 15.5
  Top Layer w0.261: U1.4 5.75,30.125 5.75,31.45 6.1,31.8 v1(7.125,31.8) 7.125,31.892 7.273,32.04 7.273,32.052 7.405,32.185 7.405,32.337 7.406,32.631 U4.4 ; v1@8.889,40.083 8.889,39.151 J1.3
  Bottom Layer w0.261: v1(7.125,31.8) 7.125,31.892 7.32,32.087 7.32,32.458 cw(c8.189,32.458) 7.574,33.072 8.531,34.029 ccw(c7.441,35.119) 8.983,35.119 8.983,39.988 8.788,40.183 v1(8.788,40.275)
VBUS: F1.1 J1.1 U1.3 U4.8 | length 17.2
  Top Layer w0.3: U1.3@5.05,31.025 5.05,31.619 5.4,31.969 v1(5.4,32.05) ; v1(9.575,32.8) 9.575,32.881 9.725,33.031 U4.8 ; 10.19,38.049 J1.1
  Top Layer w0.4: 10.19,38.049 10.19,37.75 v1(10.815,37.125)
  Top Layer w0.5: v1(10.815,37.125) F1.1
  Bottom Layer w0.2: v1(5.4,32.05) 5.4,32 6.3,31.1 8.625,31.1 9.503,31.978 9.503,32.728 v1(9.575,32.8)
  Bottom Layer w0.3: v1(9.575,32.8) 10.815,34.04 v1(10.815,37.125)
VIN: P1.15 U2.3 | length 10.1
  Top Layer w0.5: U2.3 v1(4.225,11.608)
  Bottom Layer w0.5: P1.15@1.27,3.81 4.225,6.765 4.225,11.562 v1@4.179,11.608
XTAL1: C10.2 U3.7 Y1.1 | length 6.2
  Top Layer w0.127: U3.7 11.9,22.768 11.9,21.725 11.45,21.275 11.45,21.025 12.304,20.171 12.304,19.328 Y1.1@12.3,19.324
  Top Layer w0.3: C10.2 11.611,18.502 Y1.1@12.145,18.502
XTAL2: C11.2 U3.8 Y1.3 | length 5.8
  Top Layer w0.127: U3.8 11.837,23.538 12.376,22.999 cw(c12.286,22.91) 12.376,22.82 12.244,22.688 ccw(c12.334,22.598) 12.244,22.508 ccw(c12.334,22.598) 12.423,22.508 12.883,22.968 cw(c12.973,22.879) 13.063,22.968 cw(c12.973,22.879) 13.063,22.789 12.914,22.64 ccw(c13.004,22.55) 12.914,22.461 13.1,22.275 13.1,22.142 13.1,22.131 12.569,21.6 Y1.3@12.569,21.189
  Top Layer w0.3: Y1.3@13,21.4 13.193,21.4 C11.2
pads on no net: "U4.10 : NC" "U4.13 : NC" "U4.14 : NC" "U4.15 : NC" "U4.16 : NC" "U4.17 : NC" "U4.18 : NC" "U4.19 : NC" "U4.20 : NC" "U4.21 : NC" "U4.22 : NC" J1.4 U4.1 U4.2 U4.12 U4.23 U4.24 U4.27
copper on no net: | length 0
  Top Layer w0.3: 8.221,39.169 8.24,39.15
  other v2: 1.27,1.27 16.51,1.27 1.27,41.91 16.51,41.91

## Polygon pours and split planes (outlines as drawn)
GND on Bottom Layer "NONET_L01_P-001" (solid, pour order 4): 1,0.015 cw(c1,0.981) 0.317,0.298 0.283,0.333 cw(c0.966,1.015) 0,1.015 0,42.183 cw(c1,42.189) 0.29,42.893 0.317,42.921 cw(c0.998,42.213) 1.011,43.195 16.895,43.195 cw(c16.715,42.129) 17.599,42.75 17.481,42.893 cw(c16.797,42.201) 17.77,42.183 17.77,1.015 cw(c16.784,1.013) 17.481,0.316 cw(c16.759,1.017) 16.67,0.015
GND on Top Layer "NONET_L01_P-001" (solid, pour order 3): 1,0.015 cw(c1,0.981) 0.317,0.298 0.283,0.333 cw(c0.966,1.015) 0,1.015 0,42.183 cw(c1,42.189) 0.29,42.893 0.317,42.921 cw(c0.998,42.213) 1.011,43.195 16.895,43.195 cw(c16.715,42.129) 17.599,42.75 17.481,42.893 cw(c16.797,42.201) 17.77,42.183 17.77,1.015 cw(c16.784,1.013) 17.481,0.316 cw(c16.759,1.017) 16.67,0.015

## Keep-outs
Keep-Out Layer:
  the board outline again, w0.254

## Other copper
Top Layer:
  pour cut-out: 10.218,19.651 12.163,17.707 14.637,20.181 12.693,22.126
Bottom Layer:
  rectangle net GND: 6.425,33.95 7.425,35.95
  region net GND: 8.875,22.625 10.275,24.025 8.875,25.425 7.475,24.025

## Silkscreen, mask and mechanical layers (free items; w line width, h text height)
Top Overlay:
  drawing of 21 lines, arcs and shapes, not listed
  text "M1.8" at 13.525,42.775 h1.63 r270
  text "PB5" at 2.375,39.8 h0.81 r270
  text "PB4" at 15.4,38.975 h0.81 r90
  text "+3.3V" at 2.375,37.5 h0.81 r270
  text "PB3" at 15.4,36.425 h0.81 r90
  text "AREF" at 2.375,34.875 h0.81 r270
  text "PB2" at 15.4,33.85 h0.81 r90
  text "PC0" at 2.375,32.2 h0.81 r270
  text "PB1" at 15.4,31.35 h0.81 r90
  text "PC1" at 2.375,29.625 h0.81 r270
  text "PB0" at 15.4,28.825 h0.81 r90
  text "ARC NANO" at 3.328,28.578 h2.54 r270
  text "PC2" at 2.375,27.125 h0.81 r270
  text "PD7" at 15.4,26.3 h0.81 r90
  text "PC3" at 2.375,24.625 h0.81 r270
  text "PD6" at 15.4,23.75 h0.81 r90
  text "PC4" at 2.375,22.075 h0.81 r270
  text "PD5" at 15.4,21.2 h0.81 r90
  text "PC5" at 2.375,19.475 h0.81 r270
  text "PD4" at 15.4,18.625 h0.81 r90
  text "PD2" at 2.375,17 h0.81 r270
  text "PD3" at 15.4,16.075 h0.81 r90
  text "PB3" at 2.375,14.475 h0.81 r270
  text "PD2" at 15.4,13.55 h0.81 r90
  text "+5V" at 2.375,11.95 h0.81 r270
  text "GND" at 15.4,11.025 h0.81 r90
  text "RST" at 2.375,9.375 h0.81 r270
  text "RST" at 15.4,8.475 h0.81 r90
  text "GND" at 2.375,6.8 h0.81 r270
  text "PD0" at 15.4,5.95 h0.81 r90
  text "MOSI" at 13.575,4.4 h0.81 r270
  text "GND" at 14.175,4.325 h0.81 r270
  text "VIN" at 2.375,4.275 h0.81 r270
  text "+5V" at 12.975,4.275 h0.81 r270
  text "ICSP" at 3.702,4.2 h2 r270
  text "PD1" at 15.4,3.425 h0.81 r90
  text "MISO" at 12.975,2.675 h0.81 r270
  text "SCK" at 13.575,2.575 h0.81 r270
  text "RST" at 14.175,2.575 h0.81 r270
Bottom Overlay:
  lines w0.152: 4.976,2.922 7.601,2.922 8.234,2.288 ; 9.536,3.54 10.154,2.922 12.801,2.922
  text "PB5" at 4.025,39.125 h1
  text "PB4" at 14.875,39.075 h1
  text "STUDLAB" at 7.054,38.252 h4 r90
  text "Rev: 1.0" at 13.36,38.125 h1.63 r90
  text "+3.3V" at 4.55,36.575 h1
  text "PB3" at 14.875,36.54 h1
  text "PB2" at 14.875,34 h1
  text "AREF" at 4.35,33.4 h1
  text "PC0" at 3.975,31.5 h1
  text "PB1" at 14.875,31.46 h1
  text "PC1" at 3.875,28.95 h1
  text "PB0" at 14.875,28.92 h1
  text "PC2" at 3.975,26.425 h1
  text "PD7" at 14.875,26.38 h1
  text "PC3" at 3.95,23.875 h1
  text "PD6" at 14.875,23.84 h1
  text "PC4" at 4.025,21.35 h1
  text "PD5" at 14.875,21.3 h1
  text "PC5" at 3.975,18.8 h1
  text "PD4" at 14.875,18.76 h1
  text "Designed in Belarus" at 13.104,17.145 h1.63 r90
  text "PD2" at 4.025,16.25 h1
  text "PD3" at 14.875,16.22 h1
  text "PB3" at 4.025,13.725 h1
  text "PD2" at 14.875,13.68 h1
  text "+5V" at 4.025,11.3 h1
  text "GND" at 14.875,11.14 h1
  text "RST" at 4.075,8.75 h1
  text "RST" at 14.875,8.6 h1
  text "GND" at 4.075,6.2 h1
  text "PD0" at 14.875,6.06 h1
  text "+5V" at 4.725,4 h0.81
  text "GND" at 14.05,4 h0.81
  text "VIN" at 3.875,3.3 h1
  text "PD1" at 14.875,3.3 h1
  text "SCK" at 4.675,2.725 h0.81
  text "MOSI" at 14.15,2.725 h0.81
  text "MISO" at 4.725,1.425 h0.81
  text "RST" at 14.075,1.4 h0.81

## Text inside footprints (layer, text, board x,y; h text height)
J1: Mechanical 13 "PCB EDGE" at 4.09,43.2 h0.41 r180